# Altium PCB PCB.PcbDoc (part 1 of 2)
Units mm, origin at the board's own origin, x right, y up, seen from the top; angles counter-clockwise.
Board outline 44.3 x 31.8 mm, 4 copper layers (Top Layer, Int1 (GND), Int2 (PWR), Bottom Layer), stack 1.369 mm thick; 105 components, 87 nets, 372 pads, 193 vias.
Unrouted connection lines stored in the file: 3.
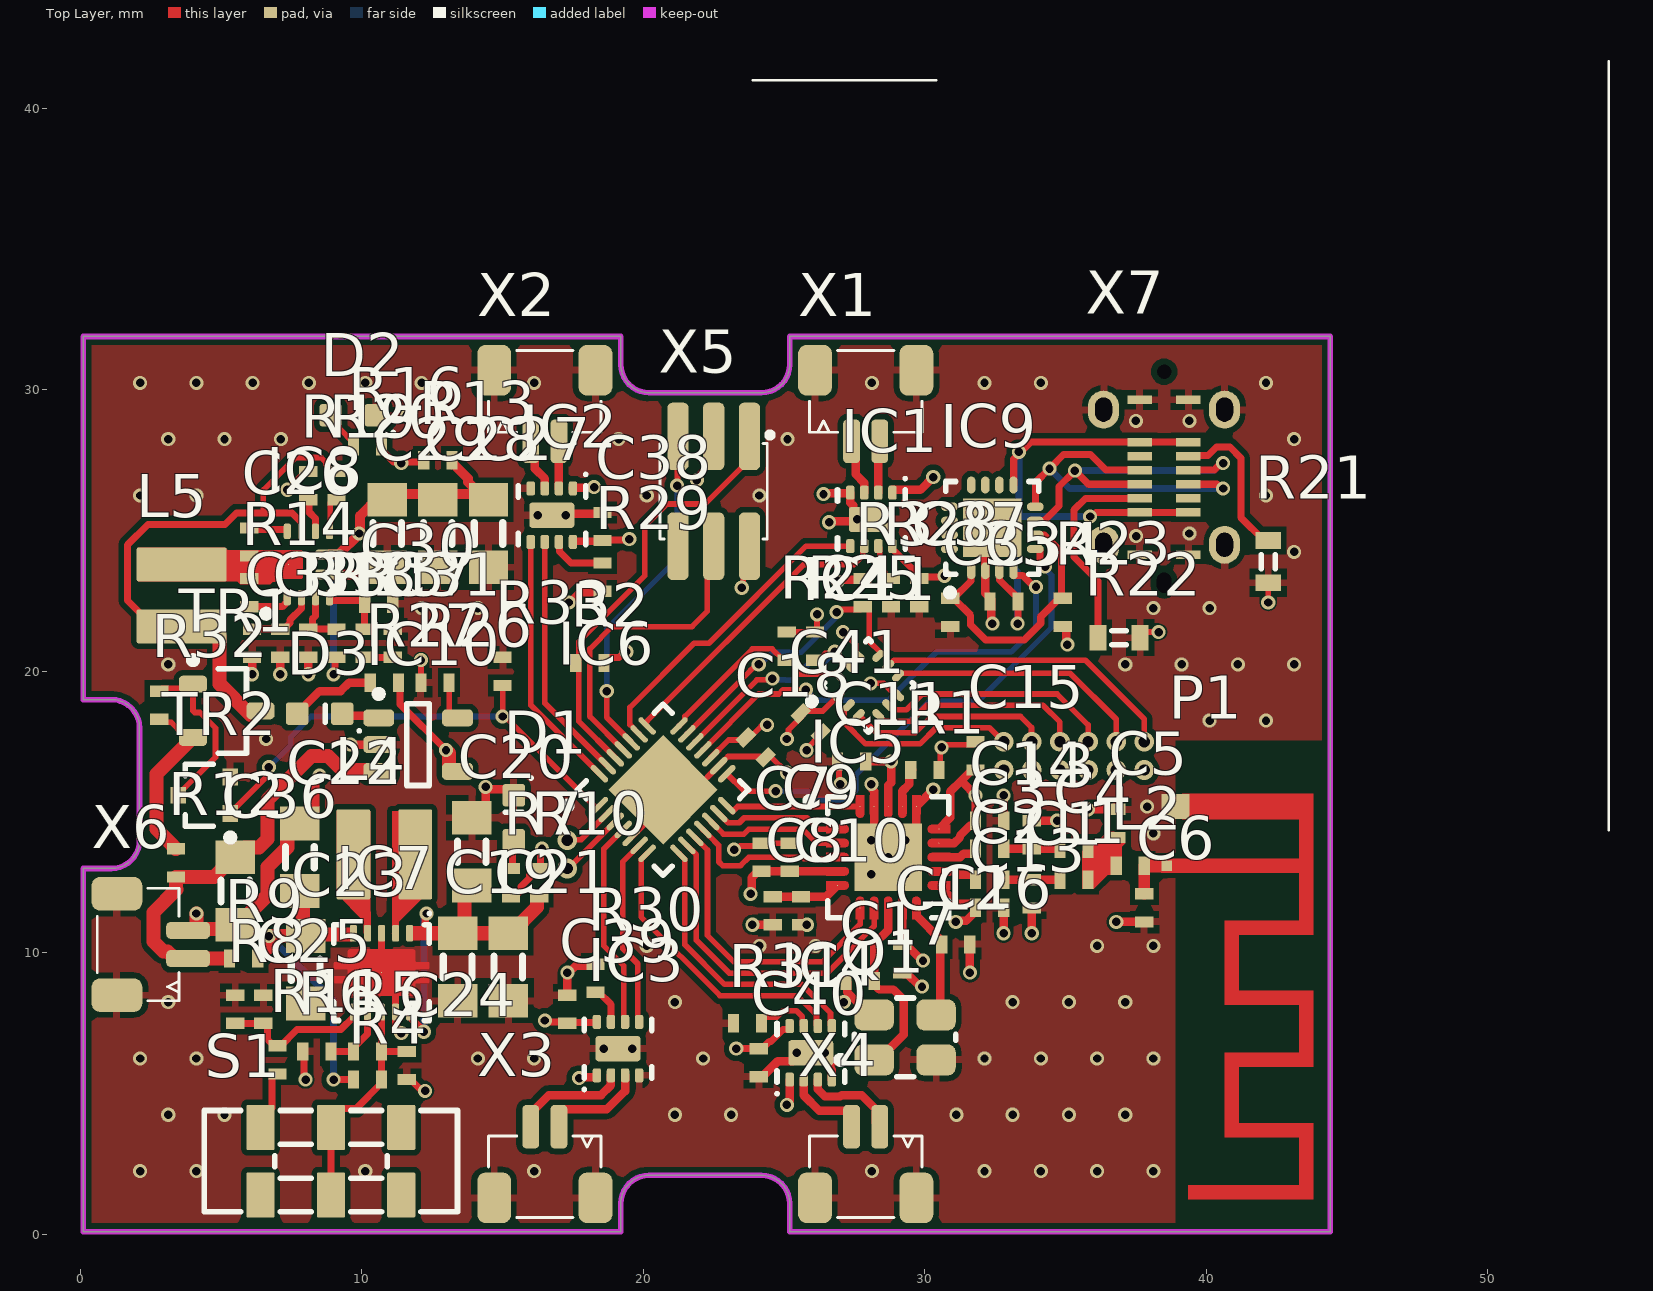
[diagram p0: Top Layer view]
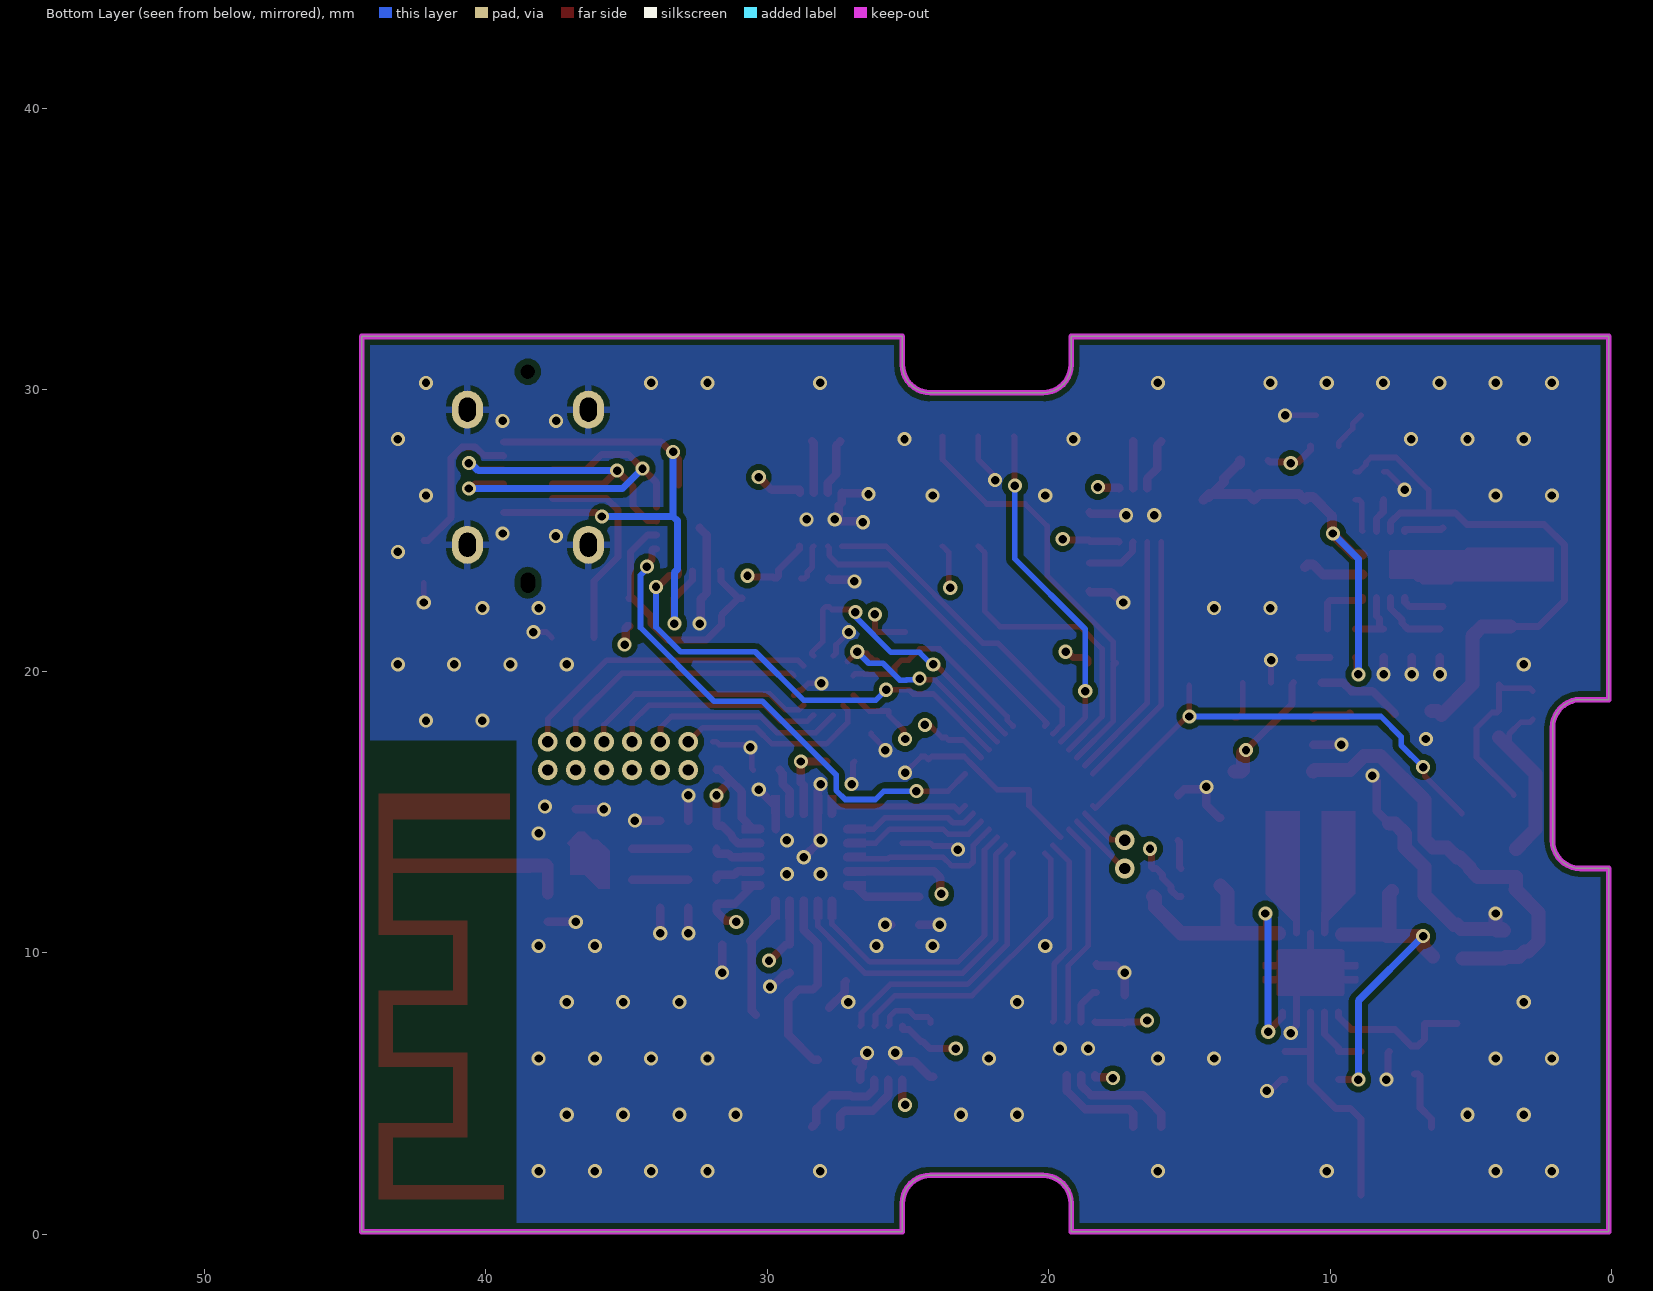
[diagram p1: Bottom Layer view, seen from below]
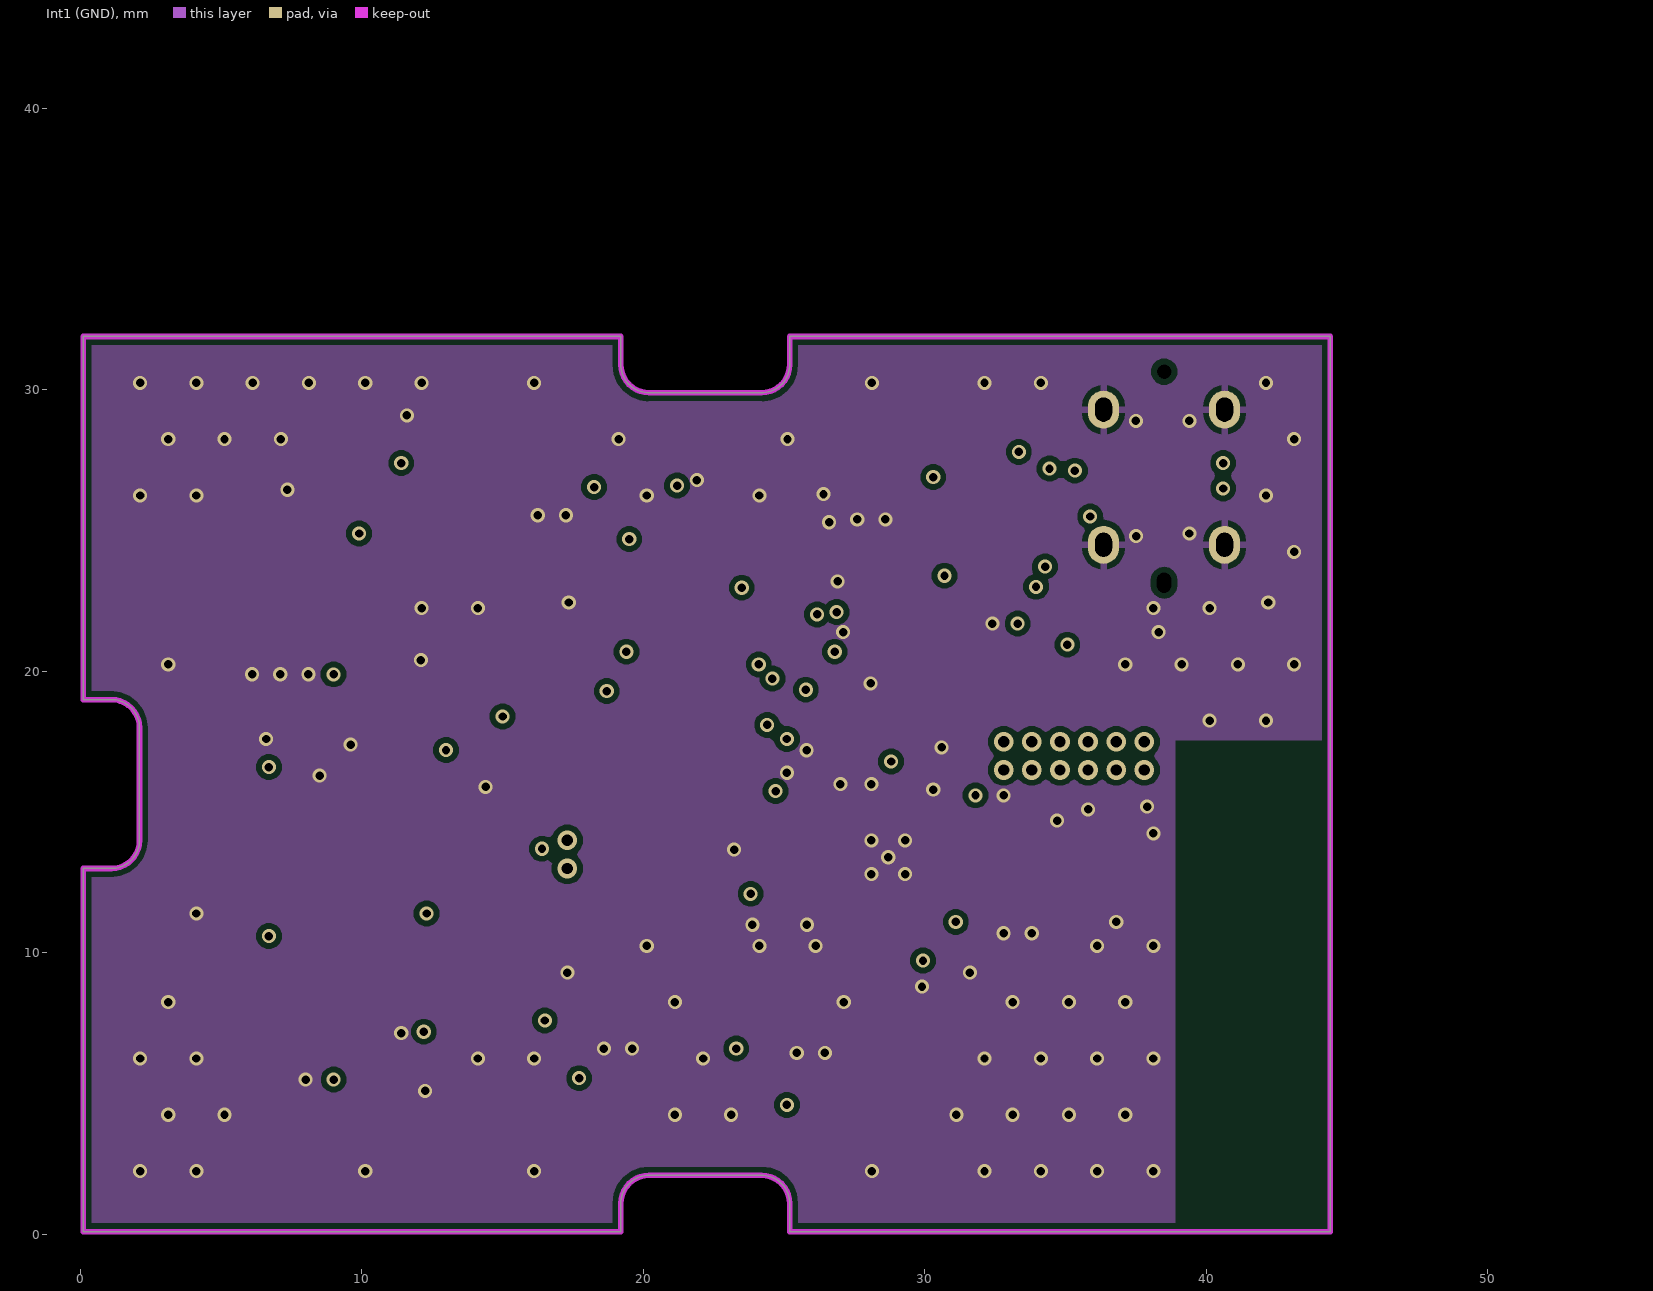
[diagram p2: Int1 (GND)]
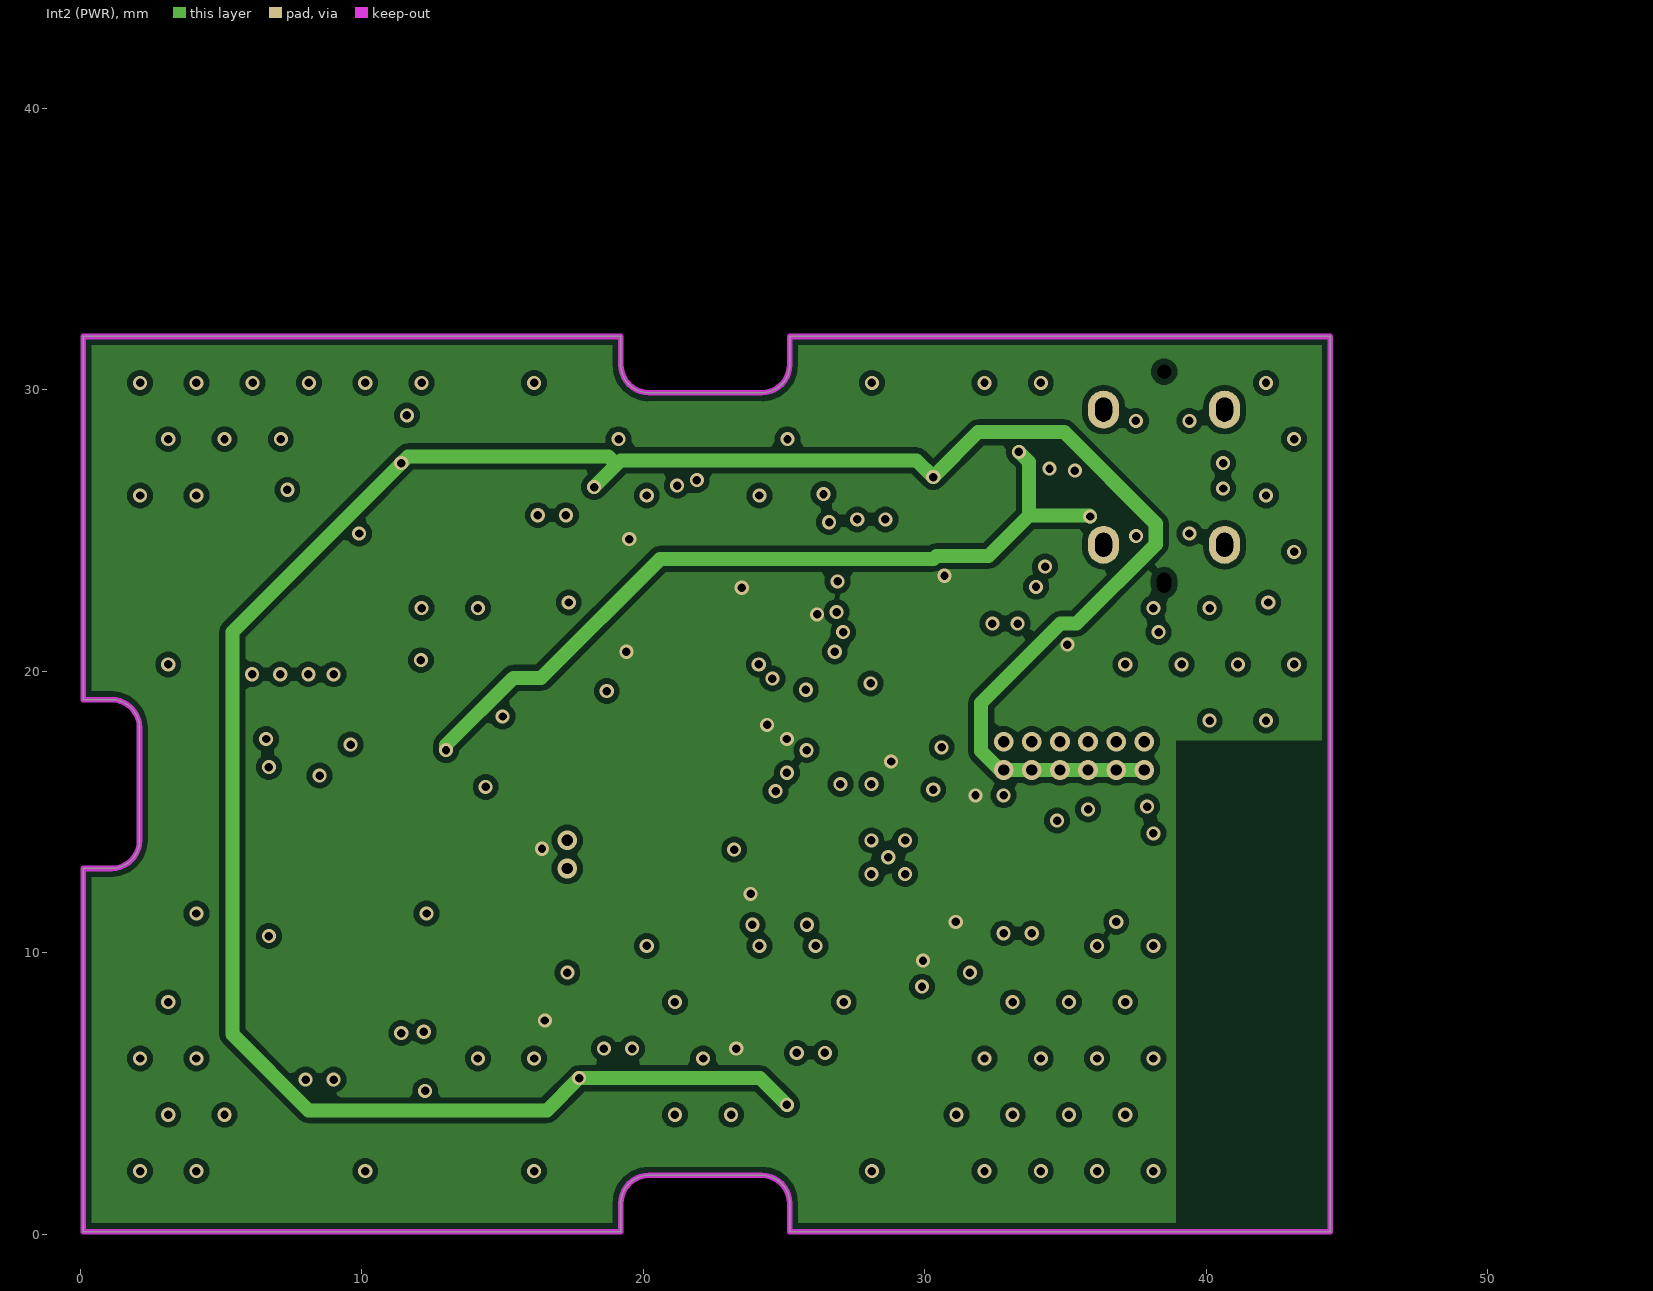
[diagram p3: Int2 (PWR)]
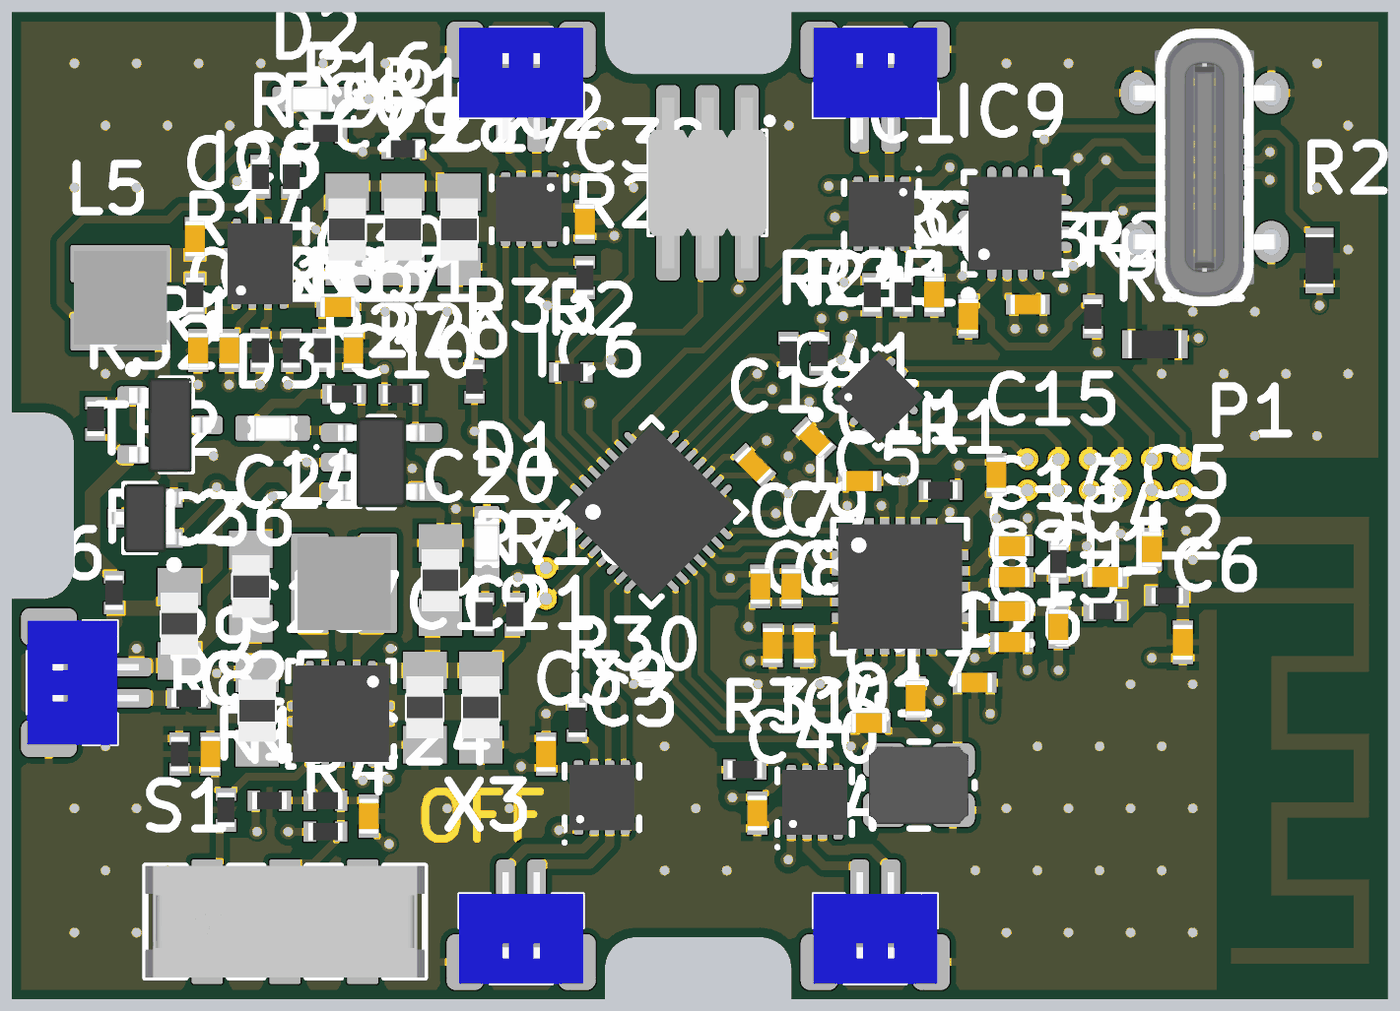
[diagram p5: 3D render of the assembled board from above, using the file's embedded part models]

## Layer stack, top to bottom
Top Solder: solder mask 0.0254, SM-001, Dk 4
Top Layer: signal copper 0.035
Dielectric 1: prepreg 0.1295, PP-017, Dk 4.3
Dielectric 2: prepreg 0.1295, PP-017, Dk 4.3
Int1 (GND): signal copper 0.035
Dielectric 3: core 0.7112, Core-039, Dk 4.8
Int2 (PWR): signal copper 0.035
Dielectric 4: prepreg 0.1295, PP-017, Dk 4.3
Dielectric 5: prepreg 0.1295, PP-017, Dk 4.3
Bottom Layer: signal copper 0.035
Bottom Solder: solder mask 0.0254, SM-001, Dk 4

## Board outline
0.1,13 1.1,13 ccw(c1.1,14) 2.1,14 2.1,18 ccw(c1.1,18) 1.1,19 0.1,19 0.1,31.9 19.2,31.9 19.2,30.9 ccw(c20.2,30.9) 20.2,29.9 24.2,29.9 ccw(c24.2,30.9) 25.2,30.9 25.2,31.9 44.4,31.9 44.4,0.1 25.2,0.1 25.2,1.1 ccw(c24.2,1.1) 24.2,2.1 20.2,2.1 ccw(c20.2,1.1) 19.2,1.1 19.2,0.1 0.1,0.1

## Design rules (kind name [scope] priority, off if disabled: settings)
Clearance [All] p1: gap=0.2 ignorepadtopadclearanceinfootprint=TRUE
ComponentClearance [All] p1: gap=0.2 collisioncheckmode=3 verticalgap=0.2 showdistances=FALSE
MinimumSolderMaskSliver [All] p1: minsoldermaskwidth=0
PolygonConnect Antenna_DirectConnect [InComponent('P1')] p1: thpad.connectstyle=Relief thpad.reliefconductorwidth=0.2 thpad.reliefentries=4 thpad.polygonreliefangle="90 Angle" thpad.airgapwidth=0.2 smdpad.connectstyle=Direct smdpad.reliefconductorwidth=0.254 smdpad.reliefentries=4 smdpad.polygonreliefangle="90 Angle" smdpad.airgapwidth=0.254 via.connectstyle=Direct via.reliefconductorwidth=0.254 via.reliefentries=4 via.polygonreliefangle="90 Angle" via.airgapwidth=0.254
PolygonConnect [All] p2: thpad.connectstyle=Relief thpad.reliefconductorwidth=0.25 thpad.reliefentries=4 thpad.polygonreliefangle="90 Angle" thpad.airgapwidth=0.2 smdpad.connectstyle=Relief smdpad.reliefconductorwidth=0.25 smdpad.reliefentries=4 smdpad.polygonreliefangle="90 Angle" smdpad.airgapwidth=0.2 via.connectstyle=Direct via.reliefconductorwidth=0.254 via.reliefentries=4 via.polygonreliefangle="90 Angle" via.airgapwidth=0.254
RoutingVias [All] p1: holewidth=0.3 width=0.5 viastyle="Through Hole" minholewidth=0.3 minwidth=0.5 maxholewidth=0.3 maxwidth=0.5
SilkToSilkClearance [All] p1: silktosilkclearance=0
SilkToSolderMaskClearance [IsPad] p1: minsilkscreentomaskgap=0 clearancetoexposedcopper=TRUE
SolderMaskExpansion [All] p1: expansion=0.05 istentingtop=FALSE
Width [All] p1: maxlimit=1 minlimit=0.2 preferedwidth=0.4
26 further rules are at their usual default settings.

## Classes and differential pairs
component class U_LED_Driver: C41 IC11 R3
component class U_MotorDrivers: C37 C38 C39 C40 IC1 IC2 IC3 IC4 R28 R29 R30 R31
component class U_USBandBatteryCharger: C34 C35 C36 D3 IC9 IC10 R23 R26 R27
component class U_Power: C19 C20 C21 C22 C23 C24 C25 C26 C27 C28 C29 C30 C31 C32 C33 D1 D2 IC7 IC8 L4 L5 R4 R5 R6 R7 R8 R9 R10 R11 R12 R13 R14 R15 R16 R17 R18 R19 R20 R32 R33 S1 TR1 TR2
component class U_MCU: C18 IC6 R2 R24 R25 X5
component class Overview: R21 R22 X1 X2 X3 X4 X6 X7
component class U_Radio: C1 C2 C3 C4 C5 C6 C7 C8 C9 C10 C11 C12 C13 C14 C15 C16 C17 IC5 L1 L2 L3 P1 Q1 R1

## Components (designator, comment, footprint, x,y, rotation, side; value= is the part's Value field where it differs from the comment)
C1 "1pF" CAP0402 33.8,12.1 r90 top
C2 "100pF" CAP0402 32.3,12.6 r0 top
C3 "100pF" CAP0402 32.3,13.7 r0 top
C4 "1pF" CAP0402 35.3,13.7 r180 top
C5 "1.8pF" CAP0402 36.8,14.6 r90 top
C6 "1.5pF" CAP0402 37.8,11.6 r270 top
C7 "0.1uF" CAP0402 24.2,13.4 r270 top
C8 "0.1uF" CAP0402 24.6,11.5 r90 top
C9 "47pF" CAP0402 25.2,13.4 r270 top
C10 "47pF" CAP0402 25.6,11.5 r90 top
C11 "220pF" CAP0402 27.4,16.8 r0 top
C12 "220pF" CAP0402 29.2,9.8 r90 top
C13 "0.1uF" CAP0402 32.3,11.6 r180 top
C14 "0.1uF" CAP0402 32.3,14.7 r180 top
C15 "220pF" CAP0402 31.8,17 r270 top
C16 "27pF" CAP0402 31.1,10.3 r0 top
C17 "27pF" CAP0402 27.7,9 r180 top
C18 "0.1uF" CAP0402 24,17.3 r315 top
C19 "22uF" 0805 13.4,9.5 r90 top
C20 "4.7uF" 0805 13.9,13.6 r270 top
C21 "4.7uF" 0805 15.2,9.5 r90 top
C22 "4.7uF" 0805 7.8,13.4 r270 top
C23 "4.7uF" 0805 8,9.4 r90 top
C24 "0.1uF" CAP0402 11.6,6 r90 top
C25 "1uF" CAP0402 6.5,8 r270 top
C26 "0.1uF" CAP0402 6,24.6 r270 top
C27 "22uF" 0805 14.5,24.9 r90 top
C28 "22uF" 0805 12.7,24.9 r90 top
C29 "22uF" 0805 10.9,24.9 r90 top
C30 "DNP" CAP0402 10.6,22.4 r0 top
C31 "4.7nF" CAP0402 11.1,21 r90 top
C32 "1uF" CAP0402 6.1,21 r270 top
C33 "1uF" CAP0402 7.1,21 r270 top
C34 "1uF" CAP0402 32.812,22.488 r180 top
C35 "0.1uF" CAP0402 30.9,22.1 r90 top
C36 "4.7uF" 0805 5.5,12.2 r90 top
C37 "0.1uF" CAP0402 29.8,22.8 r90 top
C38 "0.1uF" CAP0402 18.55,25.15 r270 top
C39 "0.1uF" CAP0402 17.3,8 r270 top
C40 "0.1uF" CAP0402 24.1,6.1 r90 top
C41 "0.1uF" CAP0402 25.946,18.154 r135 top
D1 "QBLP601-R" LED0603 15.4,14.8 r90 top
D2 "QBLP601-R" LED0603 9.7,29.1 r0 top
D3 "QBLP601-R" LED0603 8.5,18.5 r0 top
IC1 "DRV8210DSG" WSON8(DRV8210) 28.1,25.4 r270 top
IC2 "DRV8210DSG" WSON8(DRV8210) 16.75,25.55 r270 top
IC3 "DRV8210DSG" WSON8(DRV8210) 19.1,6.6 r90 top
IC4 "DRV8210DSG" WSON8(DRV8210) 25.95,6.45 r90 top
IC5 "CC2500RGPR" QFN20_4X4(CC2500) 28.7,13.4 r0 top
IC6 "PIC16F18056" QFN28_4X4(PIC16F18056) 20.7,15.8 r45 top
IC7 "TPS63001" VSON10(TPS63001) 10.7,9.3 r270 top
IC8 "TPS61089RNR" VQFN12_HOTROD(TPS61089) 8.1,23.8 r90 top
IC9 "CH343P" QFN16_3X3 32.4,25.1 r90 top
IC10 "MCP73831T-XX/OT" SOT23-5(MCP73831) 12,17.4 r0 top
IC11 "IS31FL3296" QFN12-2X2(IS31FL3296) 28,19.5 r45 top
L1 "1.2nH" IND0402 35.3,12.6 r0 top
L2 "1.2nH" IND0402 37.3,13.1 r0 top
L3 "1.2nH" IND0402 33.8,14.2 r270 top
L4 "LQH3NPN2R2MJRL" INDP3030X02N 10.8,13.5 r0 top
L5 "LQH3NPN2R2MJRL" INDP3030X02N 3.6,22.7 r90 top
P1 "Inverted F antenna for 2.4GHz" INVERTED_F_ANTENNA_2400MHZ 38.4,13.1 r270 top net-tie
Q1 "26.000MHz" OSCCC322507 29.3,7 r0 top
R1 "56K2" RES0402 30,16.5 r180 top
R2 "22K" RES0402 18.1,20.3 r0 top
R3 "10K" RES0402 27.8,22.8 r270 top
R4 "100E" RES0402 10.2,5.5 r0 top
R5 "0E" RES0402 10.2,6.5 r180 top
R6 "0E" RES0402 8.4,6.5 r0 top
R7 "560E" RES0402 15.3,12.5 r270 top
R8 "22K" RES0402 5.5,8 r270 top
R9 "0E" RES0402 5.8,9.8 r0 top
R10 "0E" RES0402 16.3,12.5 r90 top
R11 "100E" RES0402 7,6.2 r90 top
R12 "0E" RES0402 3.4,13.2 r90 top
R13 "0E" RES0402 12.7,27.5 r180 top
R14 "301K" RES0402 6,22.8 r90 top
R15 "681K" RES0402 9.1,21 r270 top
R16 "2K7" RES0402 10.2,28 r0 top
R17 "17.4K" RES0402 10.1,21 r90 top
R18 "107K" RES0402 8.1,21 r90 top
R19 "127K" RES0402 8.1,26.6 r270 top
R20 "22K" RES0402 9.1,26.6 r90 top
R21 "5K1" 0603 42.2,23.9 r90 top
R22 "5K1" 0603 36.9,21.2 r180 top
R23 "0E" RES0402 34.9,22.1 r90 top
R24 "4K7" RES0402 25.1,20.9 r90 top
R25 "4K7" RES0402 26.1,20.9 r90 top
R26 "2K2" RES0402 12.6,19.6 r0 top
R27 "560E" RES0402 10.8,19.6 r180 top
R28 "0E" RES0402 28.8,22.8 r90 top
R29 "0E" RES0402 18.55,23.35 r90 top
R30 "0E" RES0402 18.3,9.1 r270 top
R31 "0E" RES0402 23.7,7.5 r0 top
R32 "10K" RES0402 2.8,18.8 r270 top
R33 "10K" RES0402 15,20 r270 top
S1 "JS202011JCQN" JS202011JCQN 8.9,2.6 r180 top
TR1 "IRLML2244TRPbF" SOT23(IRLM2244T) 5.2,18.6 r0 top
TR2 "NX6008NBKW" SOT323/SC-70(NX6008NBKW) 4.4,15.6 r180 top
X1 "BM02B-SRSS-TB" BM02B-SRSS-TB 27.9,31.6 r0 top
X2 "BM02B-SRSS-TB" BM02B-SRSS-TB 16.5,31.6 r0 top
X3 "BM02B-SRSS-TB" BM02B-SRSS-TB 16.5,0.4 r180 top
X4 "BM02B-SRSS-TB" BM02B-SRSS-TB 27.9,0.4 r180 top
X5 "20021121-00006C4LF" 20021121-00X06CXLF 22.5,26.4 r180 top
X6 "BM02B-SRSS-TB" BM02B-SRSS-TB 0.4,10.3 r90 top
X7 "USB4120-03-C" USB4120 38.5,26.9 r270 top

## Footprints (in the part's own frame and the unit in brackets; to place one, negate y for a bottom-side part, rotate by r counter-clockwise, add the part's x,y. Pads: shape width x height; smd on the part's side, far side on the other; paste and mask are expansions set on the pad)
0603 [mm]
  rect 0.6x0.9 smd: 1(-0.75,0) 2(0.75,0)
  silkscreen extent -0.25,-0.25 0.25,0.25, body extent -0.85,-0.45 0.85,0.45, height 0.55
0805 [mm]
  rect 1.2x1.4 smd: 1(-1.2,0) 2(1.2,0)
  silkscreen extent -0.38,-0.51 0.38,0.51, body extent -1,-0.6 1,0.6, height 0.7
20021121-00X06CXLF [mm]
  rrect50% 0.76x2.4 smd: 1(-1.27,-1.95) 2(-1.27,1.95) 3(0,-1.95) 4(0,1.95) 5(1.27,-1.95) 6(1.27,1.95)
  silkscreen extent -2.1,-2.1 1.91,1.7, body extent -1.91,-2.75 1.91,2.75, height 4.51
BM02B-SRSS-TB [mm] "JST SR/SZ series connector 2 pin SMD TOP entry"
  rrect50% 1.2x1.8 smd: 0(-1.8,-0.9) 0(1.8,-0.9)
  rrect50% 0.6x1.55 smd: 1(-0.5,-3.425) 2(0.5,-3.425)
  silkscreen extent -2,-3.1 2,-0.2, body extent -2,-3.8 2,-0.2, height 4.33
CAP0402 [mm] "Chip Capacitor, 2-Leads, Body 1.00x0.50mm, IPC Medium Density"
  rect 0.4x0.65 smd: 1(-0.5,0) 2(0.5,0)
  body extent -0.58,-0.33 0.58,0.33, height 0.65
IND0402 [mm] "Chip Inductor, 2-Leads, Body 1.00x0.50mm, IPC Medium Density"
  rect 0.4x0.65 smd: 1(-0.5,0) 2(0.5,0)
  body extent -0.53,-0.28 0.53,0.28, height 0.55
INDP3030X02N [mm] "Precision Wire Wound Inductor, 2-Leads, Body 3.00x3.00mm, IPC Medium Density"
  rrect10% 1.2x3.2 smd: 1(-1.1,0) 2(1.1,0)
  body extent -1.5,-1.5 1.5,1.5, height 1.2
INVERTED_F_ANTENNA_2400MHZ [mm]
  rect 0.37x0.37 smd paste-2539.97 mask+0.102: 1(0,0.2)
  rect 0.9x1 smd paste-2539.97 mask+0.102: 2(-2.1,0.5)
  Top Layer pour cut-out: -4.45,0.5 13,0.5 13,6 -4.45,6
  Top Layer region: 11.35,0.96 11.35,4.9 11.85,4.9 11.85,0.96
  Top Layer region: 9.15,4.9 11.85,4.9 11.85,5.4 9.15,5.4
  Top Layer region: 9.15,2.26 9.65,2.26 9.65,4.9 9.15,4.9
  Top Layer region: 7.15,2.26 9.15,2.26 9.15,2.76 7.15,2.76
  Top Layer region: 6.65,2.26 7.15,2.26 7.15,4.9 6.65,4.9
  Top Layer region: 4.45,4.9 7.15,4.9 7.15,5.4 4.45,5.4
  Top Layer region: 2.45,2.26 4.45,2.26 4.45,2.76 2.45,2.76
  Top Layer region: 4.45,2.26 4.95,2.26 4.95,4.9 4.45,4.9
  Top Layer region: 1.95,2.26 2.45,2.26 2.45,4.9 1.95,4.9
  Top Layer region: -2.55,4.9 2.45,4.9 2.45,5.4 -2.55,5.4
  Top Layer region: -1.65,0.75 -2.55,0.75 -2.55,4.9 -1.65,4.9
  Top Layer region: -0.25,0 0.25,0 0.25,4.9 -0.25,4.9
  Int1 (GND) pour cut-out: -4.45,0.5 13,0.5 13,6 -4.45,6
  Int2 (PWR) pour cut-out: -4.45,0.515 13,0.515 13,6.015 -4.45,6.015
  Bottom Layer pour cut-out: -4.45,0.5 13,0.5 13,6 -4.45,6
JS202011JCQN [mm]
  rrect10% 1x1.6 smd: 1(-2.5,-1.2) 2(0,-1.2) 3(2.5,-1.2) 4(2.5,1.2) 5(0,1.2) 6(-2.5,1.2)
  silkscreen extent -4.5,-1.8 4.5,1.8, body extent -4.5,-1.8 4.5,1.8, height 5.61
LED0603 [mm] "Chip Diode, 2-Leads, Body 1.60x0.80mm, IPC Medium Density"
  rrect25% 0.8x0.8 smd: 1(-0.8,0) 2(0.8,0)
  silkscreen extent 0.2,-0.66 1.46,0.3, body extent -0.8,-0.4 0.8,0.4, height 0.55
OSCCC322507 [mm]
  rrect50% 1.4x1.1 smd: 1(-1.1,-0.8) 2(1.1,-0.8) 3(1.1,0.8) 4(-1.1,0.8)
  silkscreen extent -2.42,-1.4 1.8,1.4, body extent -1.6,-1.24 1.6,1.24, height 0.99
QFN12-2X2(IS31FL3296) [mm] "QFN, 12-Leads, Body 2.00x2.00mm, Pitch 0.50mm, IPC Medium Density"
  oval 0.5x0.26 smd: 1(-0.99,0.5) 2(-0.99,0) 3(-0.99,-0.5) 7(0.99,-0.5) 8(0.99,0) 9(0.99,0.5)
  oval 0.26x0.5 smd: 4(-0.5,-0.99) 5(0,-0.99) 6(0.5,-0.99) 10(0.5,0.99) 11(0,0.99) 12(-0.5,0.99)
  silkscreen extent -1.95,-1.17 1.17,1.18, body extent -1.03,-1.03 1.03,1.03, height 0.6
QFN16_3X3 [mm] "QFN, 16-Leads, Body 3.00x3.00mm, Pitch 0.50mm, Thermal Pad 2.08x2.08mm, IPC Medium Density"
  oval 0.6x0.3 smd: 1(-1.525,0.75) 2(-1.525,0.25) 3(-1.525,-0.25) 4(-1.525,-0.75) 9(1.525,-0.75) 10(1.525,-0.25) 11(1.525,0.25) 12(1.525,0.75)
  oval 0.3x0.6 smd: 5(-0.75,-1.525) 6(-0.25,-1.525) 7(0.25,-1.525) 8(0.75,-1.525) 13(0.75,1.525) 14(0.25,1.525) 15(-0.25,1.525) 16(-0.75,1.525)
  rect 2.08x2.08 smd paste-1.04: 17(0,0)
  silkscreen extent -2.42,-1.65 1.65,1.65, body extent -1.5,-1.5 1.5,1.5, height 1
QFN20_4X4(CC2500) [mil] "QFN, 20-Leads, Body 4.00x4.00mm, Pitch 0.50mm, Thermal Pad 2.80x2.80mm, IPC Medium Density"
  round 1 smd: 1(-70.87,39.37) 2(-70.87,19.68) 3(-70.87,0) 4(-70.87,-19.68) 5(-70.87,-39.37) 6(-39.37,-70.87) 7(-19.68,-70.87) 8(0,-70.87) 9(19.69,-70.87) 10(39.37,-70.87) 11(70.87,-39.37) 12(70.87,-19.68) 13(70.87,0) 14(70.87,19.68) 15(70.87,39.37) 16(39.37,70.87) 17(19.69,70.87) 18(0,70.87) 19(-19.68,70.87) 20(-39.37,70.87)
  rect 94.49x94.49 smd paste-47.24: 21(0,0)
  Top Layer region: -39.37,55.12 -41.63,55.57 -43.55,56.85 -44.83,58.76 -45.28,61.02 -45.28,61.02 -45.28,86.61 -33.46,86.61 -33.46,61.02 -33.91,58.76 -35.19,56.85 -37.11,55.57 -39.37,55.12
  Top Layer region: 19.69,55.12 17.43,55.57 15.51,56.85 14.23,58.76 13.78,61.02 13.78,61.02 13.78,86.61 25.59,86.61 25.59,61.02 25.14,58.76 23.86,56.85 21.94,55.57 19.69,55.12
  Top Layer region: 0,55.12 -2.26,55.57 -4.18,56.85 -5.46,58.76 -5.91,61.02 -5.91,61.02 -5.91,86.61 5.91,86.61 5.91,61.02 5.46,58.76 4.18,56.85 2.26,55.57 0,55.12
  Top Layer region: -19.68,55.12 -21.94,55.57 -23.86,56.85 -25.14,58.76 -25.59,61.02 -25.59,61.02 -25.59,86.61 -13.78,86.61 -13.78,61.02 -14.23,58.76 -15.51,56.85 -17.43,55.57 -19.68,55.12
  Top Layer region: 39.37,55.12 37.11,55.57 35.19,56.85 33.91,58.76 33.46,61.02 33.46,61.02 33.46,86.61 45.28,86.61 45.28,61.02 44.83,58.76 43.55,56.85 41.63,55.57 39.37,55.12
  Top Layer region: -55.12,-39.37 -55.57,-41.63 -56.85,-43.55 -58.76,-44.83 -61.02,-45.28 -61.02,-45.28 -86.61,-45.28 -86.61,-33.46 -61.02,-33.46 -58.76,-33.91 -56.85,-35.19 -55.57,-37.11 -55.12,-39.37
  Top Layer region: -55.12,19.68 -55.57,17.43 -56.85,15.51 -58.76,14.23 -61.02,13.78 -61.02,13.78 -86.61,13.78 -86.61,25.59 -61.02,25.59 -58.76,25.14 -56.85,23.86 -55.57,21.94 -55.12,19.68
  Top Layer region: -55.12,0 -55.57,-2.26 -56.85,-4.18 -58.76,-5.46 -61.02,-5.91 -61.02,-5.91 -86.61,-5.91 -86.61,5.91 -61.02,5.91 -58.76,5.46 -56.85,4.18 -55.57,2.26 -55.12,0
  Top Layer region: -55.12,-19.68 -55.57,-21.94 -56.85,-23.86 -58.76,-25.14 -61.02,-25.59 -61.02,-25.59 -86.61,-25.59 -86.61,-13.78 -61.02,-13.78 -58.76,-14.23 -56.85,-15.51 -55.57,-17.43 -55.12,-19.68
  Top Layer region: -55.12,39.37 -55.57,37.11 -56.85,35.19 -58.76,33.91 -61.02,33.46 -61.02,33.46 -86.61,33.46 -86.61,45.28 -61.02,45.28 -58.76,44.83 -56.85,43.55 -55.57,41.63 -55.12,39.37
  Top Layer region: 39.37,-55.12 41.63,-55.57 43.55,-56.85 44.83,-58.76 45.28,-61.02 45.28,-61.02 45.28,-86.61 33.46,-86.61 33.46,-61.02 33.91,-58.76 35.19,-56.85 37.11,-55.57 39.37,-55.12
  Top Layer region: -19.68,-55.12 -17.43,-55.57 -15.51,-56.85 -14.23,-58.76 -13.78,-61.02 -13.78,-61.02 -13.78,-86.61 -25.59,-86.61 -25.59,-61.02 -25.14,-58.76 -23.86,-56.85 -21.94,-55.57 -19.68,-55.12
  Top Layer region: 0,-55.12 2.26,-55.57 4.18,-56.85 5.46,-58.76 5.91,-61.02 5.91,-61.02 5.91,-86.61 -5.91,-86.61 -5.91,-61.02 -5.46,-58.76 -4.18,-56.85 -2.26,-55.57 0,-55.12
  Top Layer region: 19.69,-55.12 21.94,-55.57 23.86,-56.85 25.14,-58.76 25.59,-61.02 25.59,-61.02 25.59,-86.61 13.78,-86.61 13.78,-61.02 14.23,-58.76 15.51,-56.85 17.43,-55.57 19.69,-55.12
  Top Layer region: -39.37,-55.12 -37.11,-55.57 -35.19,-56.85 -33.91,-58.76 -33.46,-61.02 -33.46,-61.02 -33.46,-86.61 -45.28,-86.61 -45.28,-61.02 -44.83,-58.76 -43.55,-56.85 -41.63,-55.57 -39.37,-55.12
  Top Layer region: 55.12,39.37 55.57,41.63 56.85,43.55 58.76,44.83 61.02,45.28 61.02,45.28 86.61,45.28 86.61,33.46 61.02,33.46 58.76,33.91 56.85,35.19 55.57,37.11 55.12,39.37
  Top Layer region: 55.12,-19.68 55.57,-17.43 56.85,-15.51 58.76,-14.23 61.02,-13.78 61.02,-13.78 86.61,-13.78 86.61,-25.59 61.02,-25.59 58.76,-25.14 56.85,-23.86 55.57,-21.94 55.12,-19.68
  Top Layer region: 55.12,0 55.57,2.26 56.85,4.18 58.76,5.46 61.02,5.91 61.02,5.91 86.61,5.91 86.61,-5.91 61.02,-5.91 58.76,-5.46 56.85,-4.18 55.57,-2.26 55.12,0
  Top Layer region: 55.12,19.68 55.57,21.94 56.85,23.86 58.76,25.14 61.02,25.59 61.02,25.59 86.61,25.59 86.61,13.78 61.02,13.78 58.76,14.23 56.85,15.51 55.57,17.43 55.12,19.68
  Top Layer region: 55.12,-39.37 55.57,-37.11 56.85,-35.19 58.76,-33.91 61.02,-33.46 61.02,-33.46 86.61,-33.46 86.61,-45.28 61.02,-45.28 58.76,-44.83 56.85,-43.55 55.57,-41.63 55.12,-39.37
  silkscreen extent -115,-85 85,85, body extent -79,-79 79,79, height 39
QFN28_4X4(PIC16F18056) [mm] "QFN, 28-Leads, Body 4.00x4.00mm, Pitch 0.40mm, Thermal Pad 2.75x2.75mm, IPC Medium Density"
  oval 0.8x0.2 smd: 1(-2,1.2) 2(-2,0.8) 3(-2,0.4) 4(-2,0) 5(-2,-0.4) 6(-2,-0.8) 7(-2,-1.2) 15(2,-1.2) 16(2,-0.8) 17(2,-0.4) 18(2,0) 19(2,0.4) 20(2,0.8) 21(2,1.2)
  oval 0.2x0.8 smd: 8(-1.2,-2) 9(-0.8,-2) 10(-0.4,-2) 11(0,-2) 12(0.4,-2) 13(0.8,-2) 14(1.2,-2) 22(1.2,2) 23(0.8,2) 24(0.4,2) 25(0,2) 26(-0.4,2) 27(-0.8,2) 28(-1.2,2)
  rect 2.75x2.75 smd paste-2539.97: 29(0,0)
  silkscreen extent -2.92,-2.15 2.15,2.15, body extent -2,-2 2,2, height 1
RES0402 [mm] "Chip Resistor, 2-Leads, Body 1.00x0.50mm, IPC Medium Density"
  rect 0.4x0.65 smd: 1(-0.5,0) 2(0.5,0)
  body extent -0.55,-0.28 0.55,0.28, height 0.4
SOT23(IRLM2244T) [mm] "SOT23, 3-Leads, Body 2.92x2.37mm, Pitch 0.95mm, IPC Medium Density"
  rrect50% 1x0.6 smd: 1(-1.2,0.95) 2(-1.2,-0.95) 3(1.2,0)
  silkscreen extent -1.32,-1.5 0.7,1.92, body extent -1.32,-1.52 1.32,1.52, height 1.12
SOT23-5(MCP73831) [mm] "SOT23, 5-Leads, Body 2.90x2.80mm, Pitch 0.95mm, IPC Medium Density"
  rrect50% 1.1x0.6 smd: 1(-1.4,0.95) 2(-1.4,0) 3(-1.4,-0.95) 4(1.4,-0.95) 5(1.4,0.95)
  silkscreen extent -1.52,-1.45 0.4,1.92, body extent -1.4,-1.45 1.4,1.45, height 1.45
SOT323/SC-70(NX6008NBKW) [mm] "SOT23, 3-Leads, Body 2.00x2.10mm, Pitch 0.65mm, IPC Medium Density"
  rect 0.55x0.6 smd: 1(-0.925,0.65) 2(-0.925,-0.65) 3(0.925,0)
  silkscreen extent -1.05,-1.1 0.67,1.62, body extent -1.15,-1.1 1.15,1.1, height 1.1
USB4120 [mm] "USB Type C Receptacle for USB 2.0"
  rrect50% 0x0 hole 0.52 unplated: 0(-3.75,0)
  rrect50% 0x0 hole 0.52 slot 0.72 at 0 deg unplated: 0(3.75,0)
  rect 0.3x0.87 smd: A1(-2.75,0.865) A4(-1.25,0.865) A5(-0.75,0.865) A6(-0.25,0.865) A7(0.25,0.865) A8(0.75,0.865) A9(1.25,0.865) A12(2.75,0.865) B1(2.75,-0.865) B4(1.25,-0.865) B5(0.75,-0.865) B6(0.25,-0.865) B7(-0.25,-0.865) B8(-0.75,-0.865) B9(-1.25,-0.865) B12(-2.75,-0.865)
  oval 1.35x1.1 hole 0.6 slot 0.85 at 0 deg unplated: SHELL(-2.4,2.15) SHELL(-2.4,-2.15) SHELL(2.4,2.15) SHELL(2.4,-2.15)
  body extent -4.47,-2.3 4.47,2.3, height 6.5
VQFN12_HOTROD(TPS61089) [mm] "QFN, 12-Leads, Body 2.50x2.00mm, Pitch 0.70mm/0.50mm, IPC Medium Density"
  rrect50% 0.55x0.25 smd: 1(-1.175,0.75) 2(-1.175,0.25) 3(-1.175,-0.25) 4(-1.175,-0.75) 7(1.175,-0.75) 8(1.175,-0.25) 9(1.175,0.25) 10(1.175,0.75)
  rrect50% 0.35x1 smd paste-0.013: 5(-0.35,-0.75) 6(0.35,-0.75)
  round 0.025 smd paste-0.5: 11(0,0.7)
  Top Layer region: 0.45,0.2 0.469,0.204 0.485,0.215 0.496,0.231 0.5,0.25 0.5,0.25 0.5,1.15 0.496,1.169 0.485,1.185 0.469,1.196 0.45,1.2 0.45,1.2 0.3,1.2 0.281,1.196 0.265,1.185 0.254,1.169 0.25,1.15 0.25,1.15 0.25,0.87 0.246,0.851 0.235,0.835 0.219,0.824 0.2,0.82 0.2,0.82 -0.2,0.82 -0.219,0.824 -0.235,0.835 -0.246,0.851 -0.25,0.87 -0.25,0.87 -0.25,1.15 -0.254,1.169 -0.265,1.185 -0.281,1.196 -0.3,1.2 -0.3,1.2 -0.45,1.2 -0.469,1.196 -0.485,1.185 -0.496,1.169 -0.5,1.15 -0.5,1.15 -0.5,0.25 -0.496,0.231 -0.485,0.215 -0.469,0.204 -0.45,0.2 -0.45,0.2
  silkscreen extent -1.87,1.37 -1.63,1.62, body extent -1.3,-1.05 1.3,1.05, height 1
VSON10(TPS63001) [mm] "SON, 10-Leads, Body 3.00x3.00mm, Pitch 0.50mm, Thermal Pad 2.40x1.49mm, IPC Medium Density"
  rrect50% 0.6x0.25 smd: 1(-1.4,1) 2(-1.4,0.5) 3(-1.4,0) 4(-1.4,-0.5) 5(-1.4,-1) 6(1.4,-1) 7(1.4,-0.5) 8(1.4,0) 9(1.4,0.5) 10(1.4,1)
  round 0.025 smd paste-0.825: 11(0,0)
  Top Layer region: 0.4,1.2 0.39,1.202 0.382,1.207 0.377,1.215 0.375,1.225 0.375,1.225 0.375,1.637 0.37,1.661 0.357,1.682 0.336,1.695 0.313,1.7 0.313,1.7 0.187,1.7 0.164,1.695 0.143,1.682 0.13,1.661 0.125,1.637 0.125,1.637 0.125,1.225 0.123,1.215 0.118,1.207 0.11,1.202 0.1,1.2 0.1,1.2 -0.1,1.2 -0.11,1.202 -0.118,1.207 -0.123,1.215 -0.125,1.225 -0.125,1.225 -0.125,1.637 -0.13,1.661 -0.143,1.682 -0.164,1.695 -0.187,1.7 -0.187,1.7 -0.313,1.7 -0.336,1.695 -0.357,1.682 -0.37,1.661 -0.375,1.637 -0.375,1.637 -0.375,1.225 -0.377,1.215 -0.382,1.207 -0.39,1.202 -0.4,1.2 -0.4,1.2 -0.743,1.2 -0.774,1.194 -0.801,1.176 -0.819,1.149 -0.825,1.118 -0.825,1.118 -0.825,-1.118 -0.819,-1.149 -0.801,-1.176 -0.774,-1.194 -0.743,-1.2 -0.743,-1.2 -0.4,-1.2 -0.39,-1.202 -0.382,-1.207 -0.377,-1.215 -0.375,-1.225 -0.375,-1.225 -0.375,-1.637 -0.37,-1.661 -0.357,-1.682 -0.336,-1.695 -0.313,-1.7 -0.313,-1.7 -0.187,-1.7 -0.164,-1.695 -0.143,-1.682 -0.13,-1.661 -0.125,-1.637 -0.125,-1.637 -0.125,-1.225 -0.123,-1.215 -0.118,-1.207 -0.11,-1.202 -0.1,-1.2 -0.1,-1.2 0.1,-1.2 0.11,-1.202 0.118,-1.207 0.123,-1.215 0.125,-1.225 0.125,-1.225 0.125,-1.637 0.13,-1.661 0.143,-1.682 0.164,-1.695 0.187,-1.7 0.187,-1.7 0.313,-1.7 0.336,-1.695 0.357,-1.682 0.37,-1.661 0.375,-1.637 0.375,-1.637 0.375,-1.225 0.377,-1.215 0.382,-1.207 0.39,-1.202 0.4,-1.2 0.4,-1.2 0.743,-1.2 0.774,-1.194 0.801,-1.176 0.819,-1.149 0.825,-1.118 0.825,-1.118 0.825,1.118 0.819,1.149 0.801,1.176 0.774,1.194 0.743,1.2 0.743,1.2
  silkscreen extent -2.15,-1.7 1.7,1.75, body extent -1.55,-1.55 1.55,1.55, height 1
WSON8(DRV8210) [mm] "SON, 8-Leads, Body 2.00x2.00mm, Pitch 0.50mm, Thermal Pad 1.60x0.69mm, IPC Medium Density"
  rrect50% 0.5x0.3 smd: 1(-0.95,0.75) 2(-0.95,0.25) 3(-0.95,-0.25) 4(-0.95,-0.75) 5(0.95,-0.75) 6(0.95,-0.25) 7(0.95,0.25) 8(0.95,0.75)
  rrect25% 0.9x1.6 smd paste-2539.97: 9(0,0)
  silkscreen extent -1.5,-1.2 1.05,1.25, body extent -1.05,-1.05 1.05,1.05, height 0.8

## Part data
C1 C4: library part CAP_0402, Manufacturer="Samsung Electro-Mechanics", Manufacturer Partnummber=CL05C010CB5NNNC
C2 C3: library part CAP_0402, Manufacturer="Samsung Electro-Mechanics", Manufacturer Partnummber=CL05C101JB5NNNC
C5: library part CAP_0402, Manufacturer="Samsung Electro-Mechanics", Manufacturer Partnummber=CL05C1R8CC51PNC
C6: library part CAP_0402, Manufacturer="Samsung Electro-Mechanics", Manufacturer Partnummber=CL05C1R5BB5NNNC
C7 C8 C13 C14 C18 C24 C26 C35 C37 C38 C39 C40 C41: library part CAP_0402, Manufacturer="Samsung Electro-Mechanics", Manufacturer Partnummber=CL05A104KA5NNNC
C9 C10: library part CAP_0402, Manufacturer="Samsung Electro-Mechanics", Manufacturer Partnummber=CL05C470JB5NNNC
C11 C12 C15: library part CAP_0402, Manufacturer="Samsung Electro-Mechanics", Manufacturer Partnummber=CL05C221JB5NNNC
C16 C17: library part CAP_0402, Manufacturer="Samsung Electro-Mechanics", Manufacturer Partnummber=CL05C270JB5NNNC
C19 C27 C28 C29: library part 000095, Manufacturer="Murata Electronics", Manufacturer Partnummber=GRM21BR61E226ME44K, Component Type=Standard, ComponentLink1Description=Datasheet, ComponentLink2Description="Manufacturer Site", Digikey Number=490-14661-1-ND, Part Number=000095
C20 C21 C22 C23 C36: library part 000090, Manufacturer="Samsung Electro-Mechanics", Manufacturer Partnummber=CL21A475KOFNNNE, Component Type=Standard, ComponentLink1Description=Datasheet, ComponentLink2Description="Manufacturer Site", Digikey Number=1276-1065-1-ND, Part Number=000090
C25 C32 C33 C34: library part CAP_0402, Manufacturer="Samsung Electro-Mechanics", Manufacturer Partnummber=CL05A105KO5NNNC
C30: library part CAP_0402
C31: library part CAP_0402, Manufacturer="Samsung Electro-Mechanics", Manufacturer Partnummber=CL05B472KB5VPNC
D1 D2 D3: Manufacturer="QT Brightek (QTB)", Manufacturer Partnummber=QBLP601-R
IC1 IC2 IC3 IC4: Manufacturer="Texas Instruments", Manufacturer Partnummber=DRV8210DSGR
IC5: library part CC2500, Manufacturer="Texas Instruments", Manufacturer Partnummber=CC2500RGPR
IC6: Manufacturer="Microchip Technology", Manufacturer Partnummber=PIC16F18056-I/STX
IC7: Manufacturer="Texas Instruments", Manufacturer Partnummber=TPS63001DRCR
IC8: library part TPS61089, Manufacturer="Texas Instruments", Manufacturer Partnummber=TPS61089RNRR
IC9: JLCPCB Part #=C2846043, Manufacturer=WCH, Manufacturer Partnummber=CH343P
IC10: library part MCP73831, Manufacturer="Microchip Technology", Manufacturer Partnummber=MCP73831T-2ACI/OT
IC11: Manufacturer="Lumissil Microsystems", Manufacturer Partnummber=IS31FL3296-UTLS4-TR
L1 L2 L3: library part IND_0402, Manufacturer="Abracon LLC", Manufacturer Partnummber=ATFC-0402-1N2B-T
L4 L5: Manufacturer="Murata Electronics", Manufacturer Partnummber=LQH3NPN2R2MJRL, MPN=LQH3NPN2R2MJRL
P1: library part "Antenna F 2400MHz"
Q1: library part ABM8G-26.000MHZ-18-D2Y-T, Manufacturer="Abracon LLC", Manufacturer Partnummber=ABM8G-26.000MHZ-18-D2Y-T
R1: library part RES_0402, Manufacturer=YAGEO, Manufacturer Partnummber=RC0402FR-0756K2L
R2 R8 R20: library part RES_0402, Manufacturer=YAGEO, Manufacturer Partnummber=RC0402FR-0722KL
R3 R32 R33: library part RES_0402, Manufacturer=YAGEO, Manufacturer Partnummber=RC0402FR-0710KL
R4 R11: library part RES_0402, Manufacturer=YAGEO, Manufacturer Partnummber=RC0402FR-07100RL
R5 R6 R9 R10 R12 R13 R23 R28 R29 R30 R31: library part RES_0402, Manufacturer=YAGEO, Manufacturer Partnummber=RC0402JR-070RL
R7 R27: library part RES_0402, Manufacturer=YAGEO, Manufacturer Partnummber=RC0402FR-07560RL
R14: library part RES_0402, Manufacturer=YAGEO, Manufacturer Partnummber=RC0402FR-07301KL
R15: library part RES_0402, Manufacturer=YAGEO, Manufacturer Partnummber=RC0402FR-07681KL
R16: library part RES_0402, Manufacturer=YAGEO, Manufacturer Partnummber=RC0402FR-072K7L
R17: library part RES_0402, Manufacturer=YAGEO, Manufacturer Partnummber=RC0402FR-0717K4L
R18: library part RES_0402, Manufacturer=YAGEO, Manufacturer Partnummber=RC0402FR-07107KL
R19: library part RES_0402, Manufacturer=YAGEO, Manufacturer Partnummber=RC0402FR-07127KL
R21 R22: library part 000053, =Value=10K, JLCPCB Part #=C23196, Manufacturer=YAGEO, Manufacturer Partnummber=RC0603FR-075K1L, Component Type=Standard, ComponentLink1Description=Datasheet, ComponentLink2Description="Manufacturer Site", Part Number=000053
R24 R25: library part RES_0402, Manufacturer=YAGEO, Manufacturer Partnummber=RC0402FR-074K7L
R26: library part RES_0402, Manufacturer=YAGEO, Manufacturer Partnummber=RC0402FR-072K2L
S1: Manufacturer=C&K, Manufacturer Partnummber=JS202011JCQN
TR1: Manufacturer="Infineon Technologies", Manufacturer Partnummber=IRLML2244TRPBF
X1 X2 X3 X4 X6: Manufacturer=JST, Manufacturer Partnummber=BM02B-SRSS-TB
X5: JLCPCB Part #=C178291, Manufacturer="Amphenol ICC (FCI)", Manufacturer Partnummber=20021121-00006C4LF
X7: Manufacturer=GCT, Manufacturer Partnummber=USB4120-03-C

## Via types
v1: diameter 0.5, hole 0.3, Top Layer to Bottom Layer, tented bottom, 179 vias
v2: diameter 0.7, hole 0.4, Top Layer to Bottom Layer, 14 vias

## Nets (pads, with @x,y where several pads share a name; then routed paths per layer and width w, separated by ;. In a path a pad name is that pad's centre, name@x,y a point inside that pad or via, vN(x,y) a via of type N, cw(c..) or ccw(c..) an arc to the next point about the centre after c; other vN are vias at no path point)
CS: IC5.7 IC6.9 | length 11.6
  Top Layer w0.2: IC6.9@21.549,13.82 21.878,13.491 21.878,10.457 23.051,9.283 26.534,9.283 27.367,10.116 27.367,10.123 28.2,10.956 IC5.7@28.2,11.6
EN: C25.2 IC7.6 R8.2 R11.2 | length 5.5
  Top Layer w0.25: R8.2@5.5,7.5 6.625,7.5 6.65,7.475 6.65,6.925 6.875,6.7 7.125,6.7 7.375,6.95 7.375,6.96 7.69,7.275 9.25,7.275 9.7,7.725 IC7.6@9.7,7.9